# Altium PCB PCB3.pcbdoc (part 1 of 2)
Units mil, origin at the board's own origin, x right, y up, seen from the top; angles counter-clockwise.
Board outline 2519.61 x 1574.8 mil, 4 copper layers (Top Layer, Inner1, Inner2, Bottom Layer), stack 62.447 mil thick; 73 components, 68 nets, 329 pads, 85 vias.
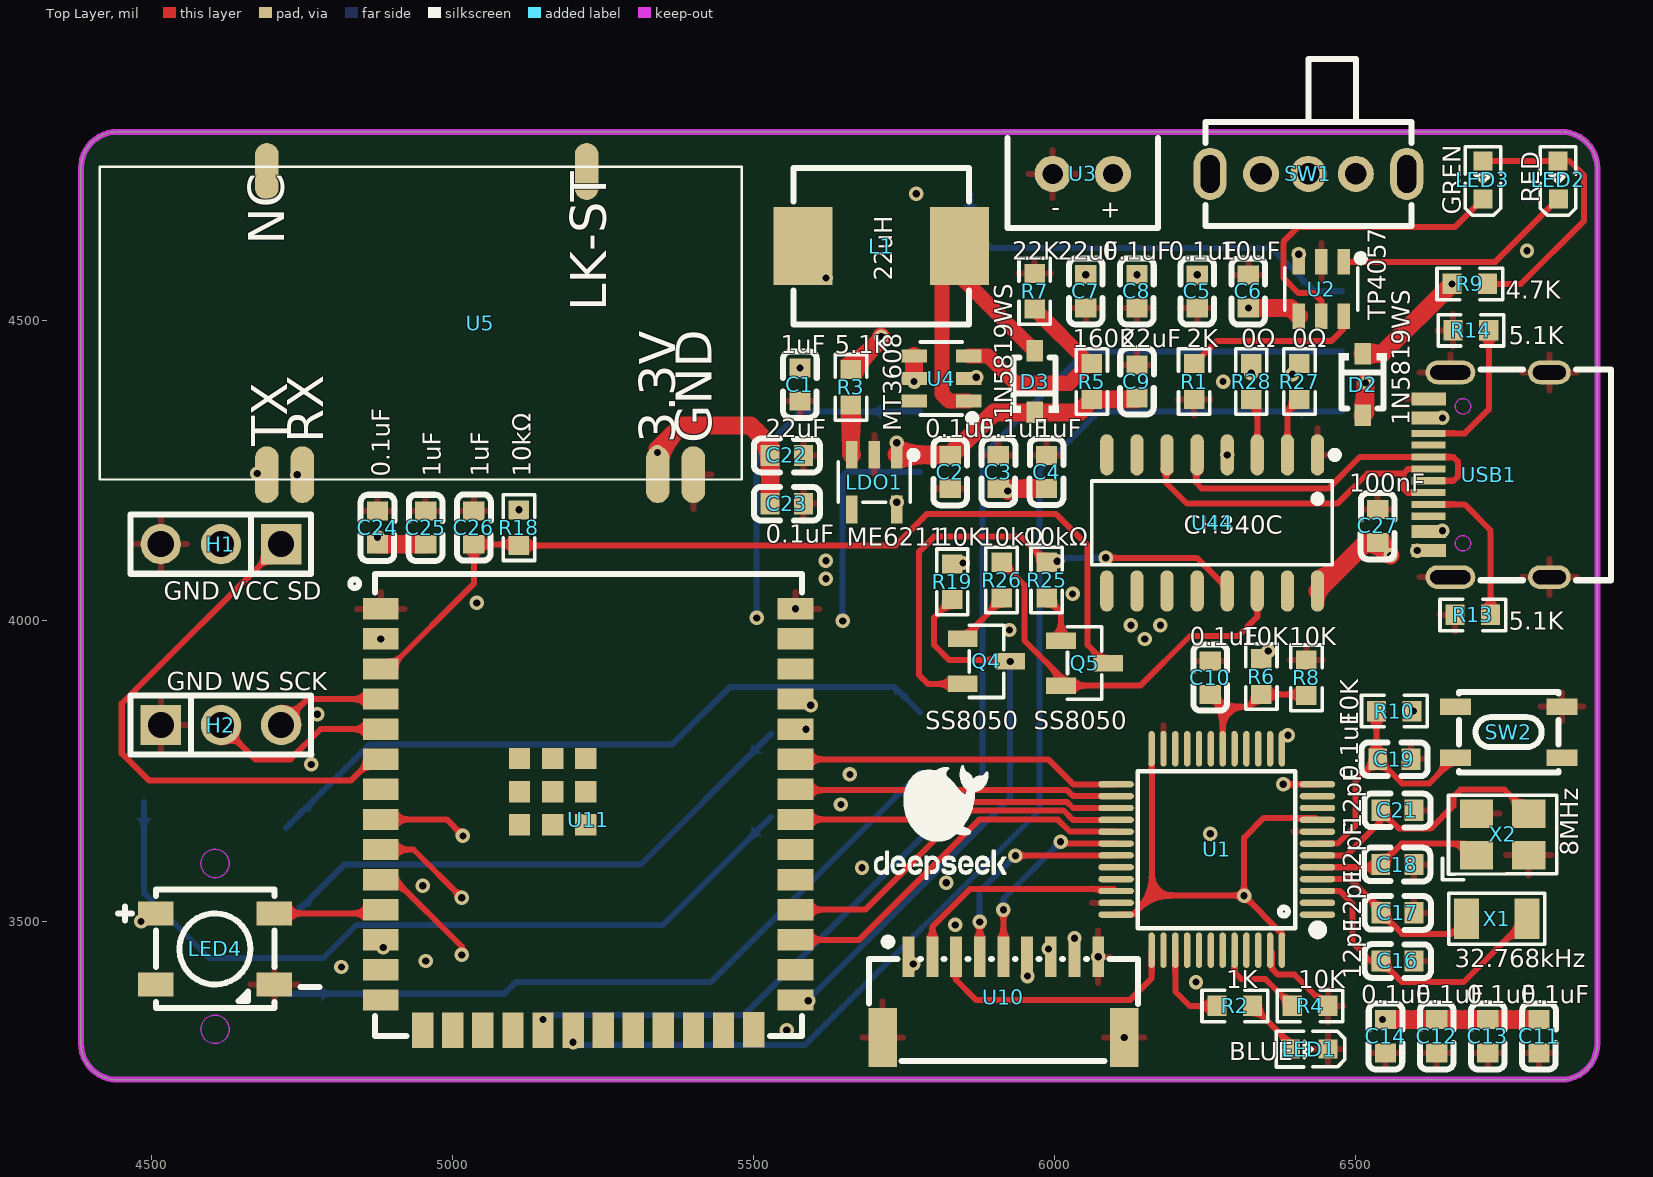
[diagram p0: Top Layer view]
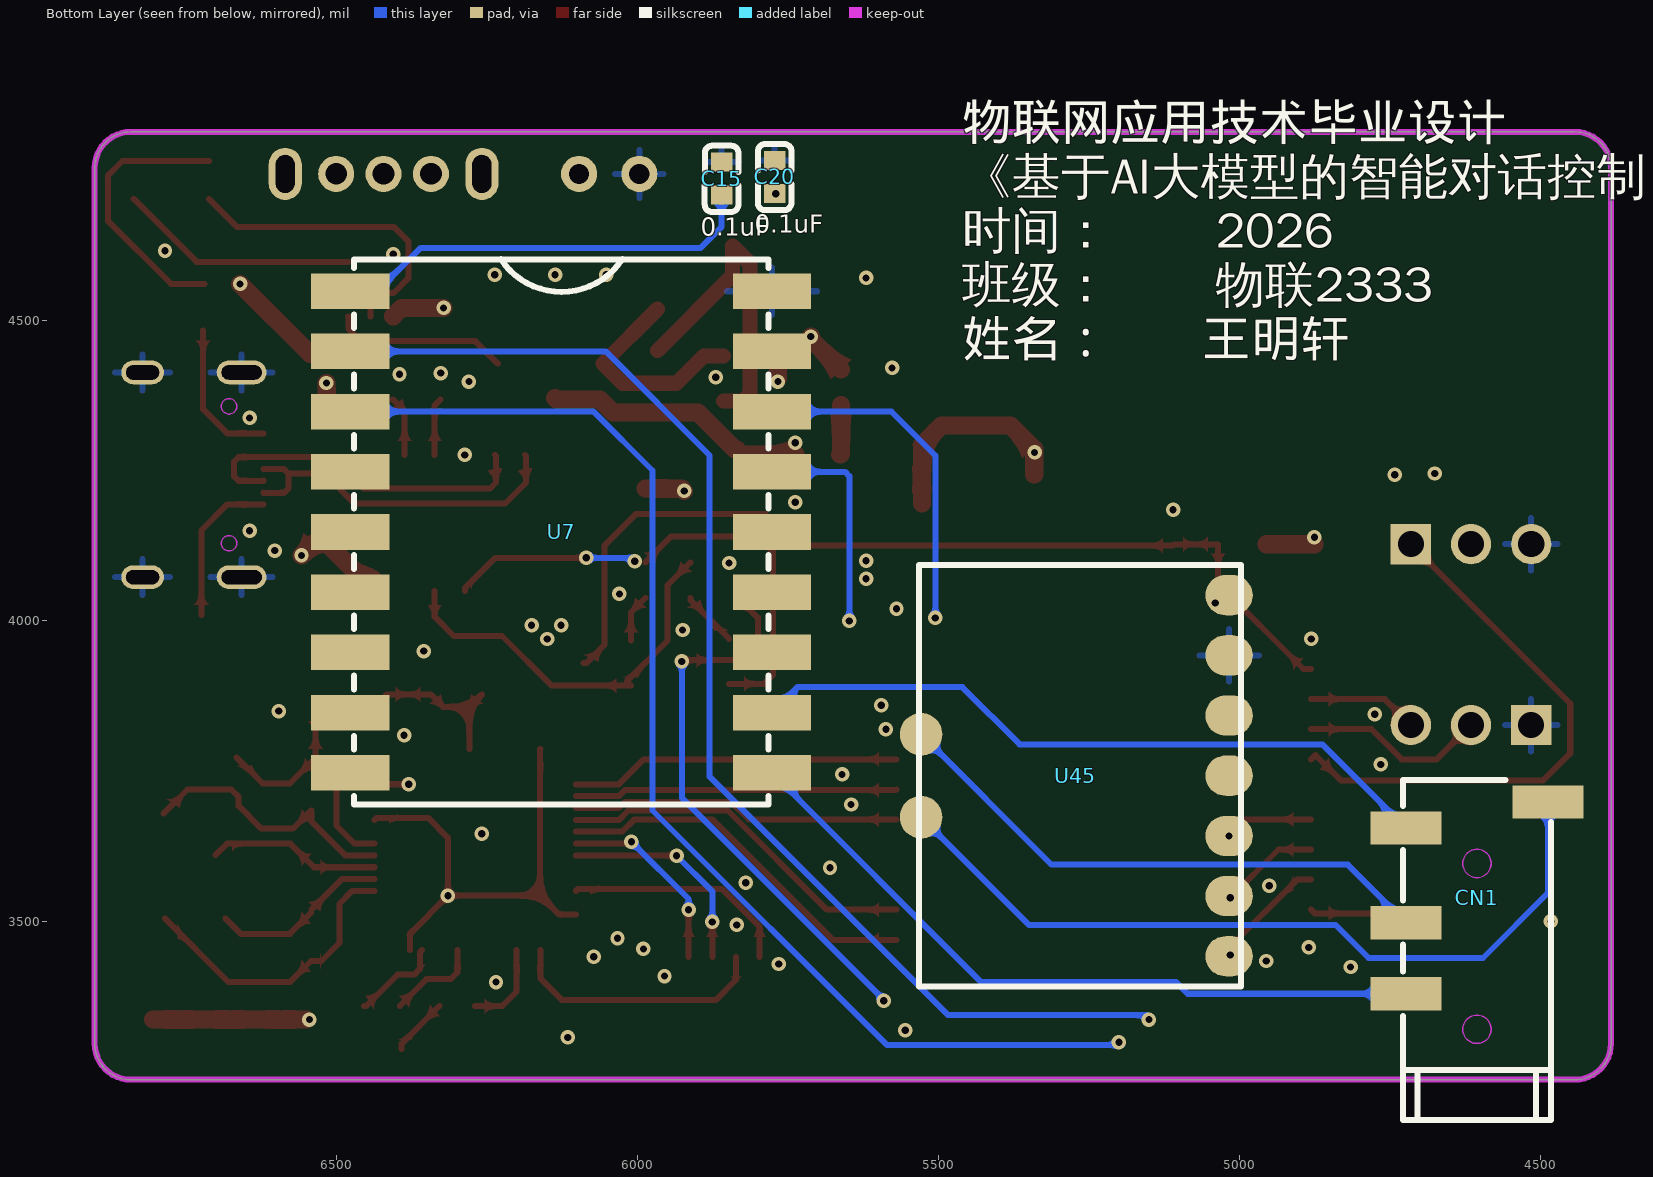
[diagram p1: Bottom Layer view, seen from below]
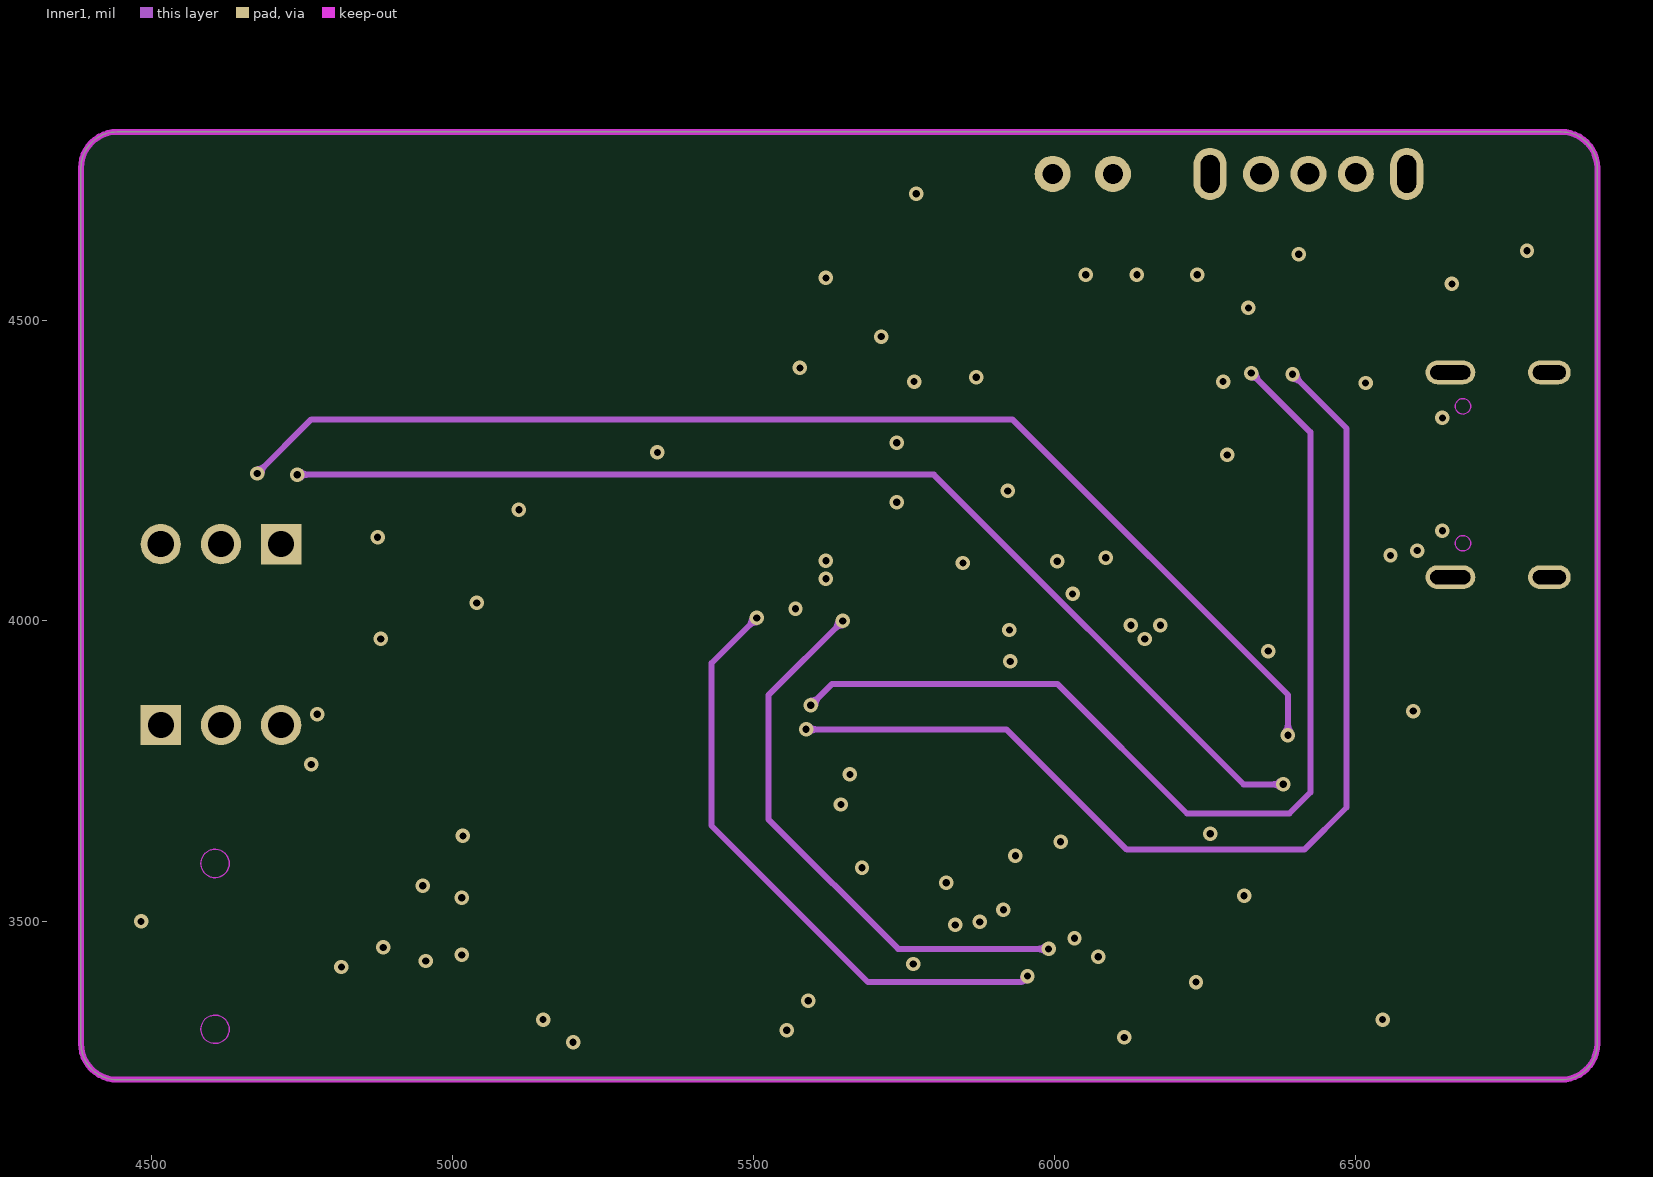
[diagram p2: Inner1]
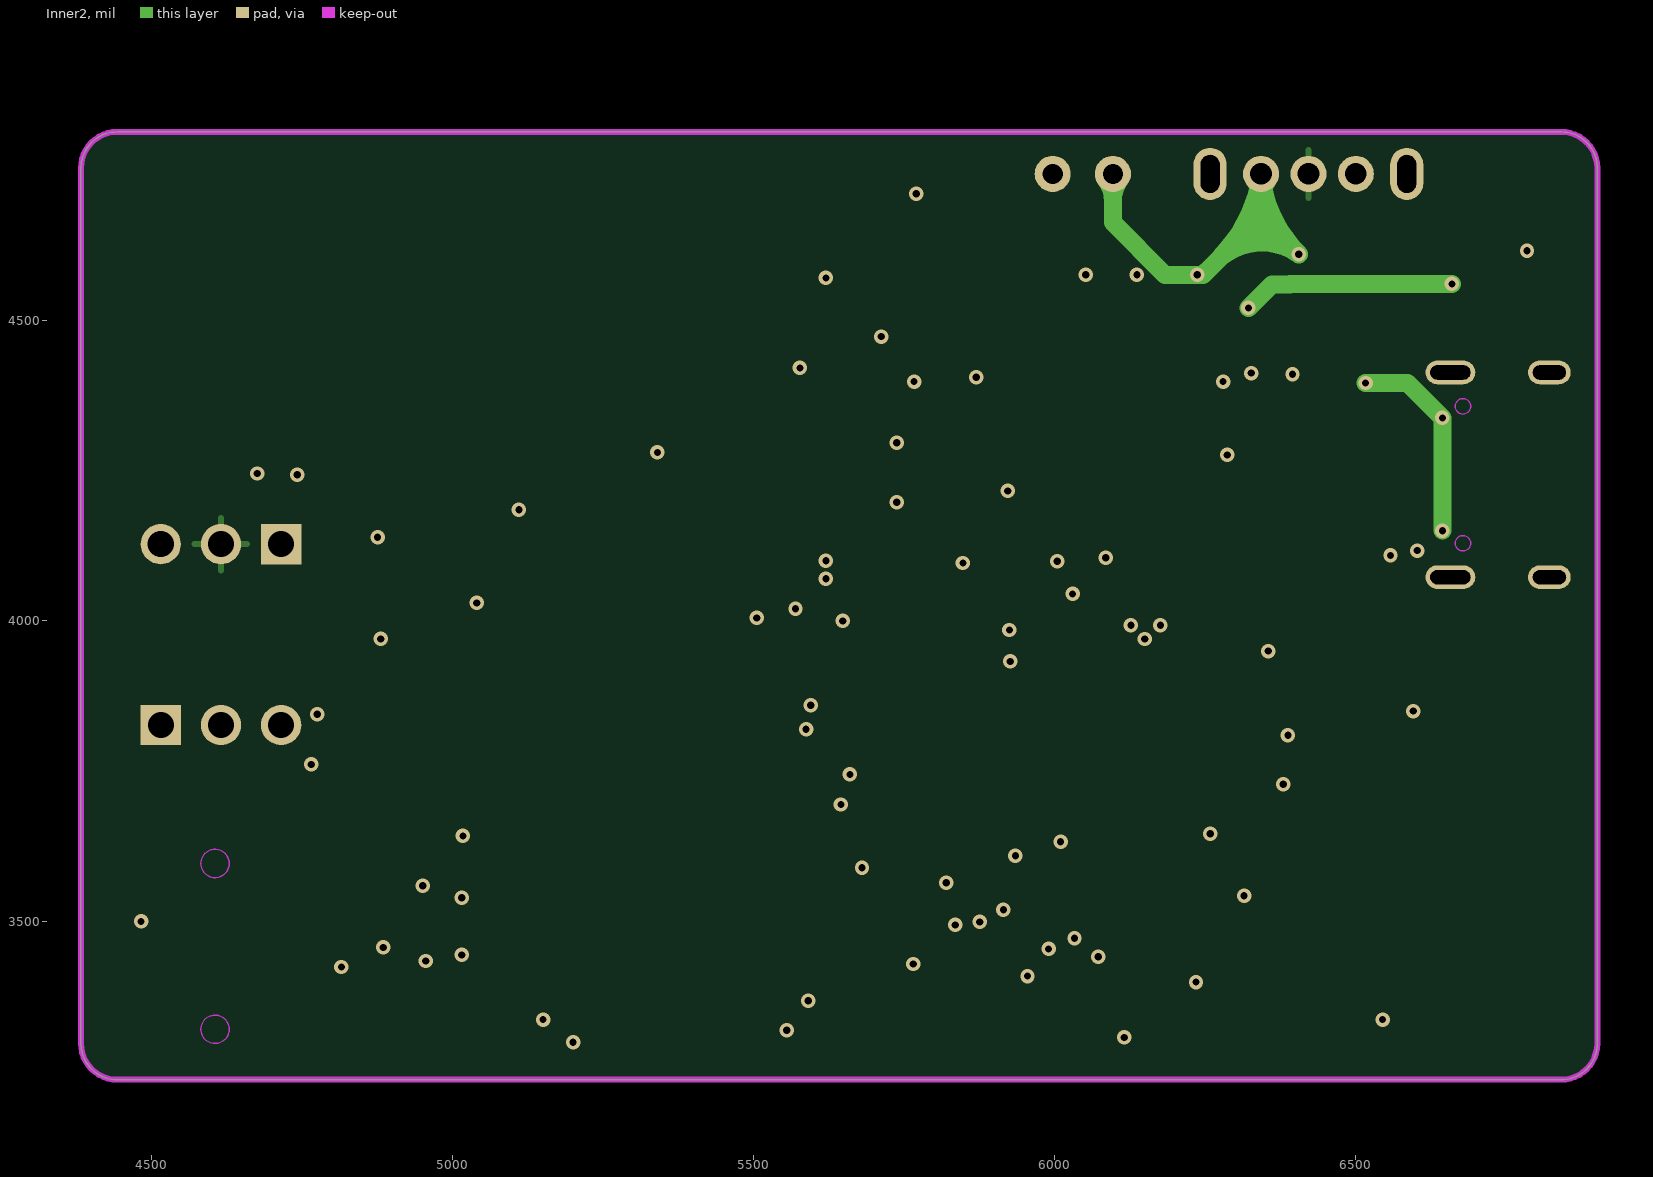
[diagram p3: Inner2]

## Layer stack, top to bottom
Top Layer: signal copper 1.378
Dielectric1: surface 8.283, 7628 RC49% 8.6mil, Dk 0
Inner1: signal copper 0.598
Dielectric2: surface 41.929, 1.1mm H/HOZ Copper, Dk 0
Inner2: signal copper 0.598
Dielectric3: surface 8.283, 7628 RC49% 8.6mil, Dk 0
Bottom Layer: signal copper 1.378

## Board outline
6841.86,3237.85 4442.25,3237.85 cw(c4442.25,3297.85) 4382.25,3297.85 4382.25,4752.66 cw(c4442.25,4752.66) 4442.25,4812.66 6841.86,4812.66 cw(c6841.86,4752.66) 6901.86,4752.66 6901.86,3297.85 cw(c6841.86,3297.85)

## Design rules (kind name [scope] priority, off if disabled: settings)
BoardOutlineClearance copperThickness1oz [All] p0: genericclearance=10 ignorepadtopadclearanceinfootprint=FALSE except(0: Arc-SplitContinuation Track-SplitContinuation SMDPad-SplitContinuation THPad-SplitContinuation Via-SplitContinuation Fill-SplitContinuation Poly-SplitContinuation Region-SplitContinuation Text-SplitContinuation)
BoardOutlineClearance copperThickness2oz [All] p0: genericclearance=10 ignorepadtopadclearanceinfootprint=FALSE except(0: Arc-SplitContinuation Track-SplitContinuation SMDPad-SplitContinuation THPad-SplitContinuation Via-SplitContinuation Fill-SplitContinuation Poly-SplitContinuation Region-SplitContinuation Text-SplitContinuation)
BoardOutlineClearance Plane_innerPlane [All] p0: genericclearance=10 ignorepadtopadclearanceinfootprint=FALSE except(0: Arc-SplitContinuation Track-SplitContinuation SMDPad-SplitContinuation THPad-SplitContinuation Via-SplitContinuation Fill-SplitContinuation Poly-SplitContinuation Region-SplitContinuation Text-SplitContinuation)
BoardOutlineClearance Copper_copperRegion [All] p0: genericclearance=10 ignorepadtopadclearanceinfootprint=FALSE except(0: Arc-SplitContinuation Track-SplitContinuation SMDPad-SplitContinuation THPad-SplitContinuation Via-SplitContinuation Fill-SplitContinuation Poly-SplitContinuation Region-SplitContinuation Text-SplitContinuation)
BoardOutlineClearance otherClearance [All] p0: genericclearance=10 ignorepadtopadclearanceinfootprint=FALSE except(0: Arc-SplitContinuation Track-SplitContinuation SMDPad-SplitContinuation THPad-SplitContinuation Via-SplitContinuation Fill-SplitContinuation Poly-SplitContinuation Region-SplitContinuation Text-SplitContinuation)
Clearance copperThickness1oz [All] p1: gap=7 ignorepadtopadclearanceinfootprint=FALSE
Clearance copperThickness2oz [All] p1: gap=7 ignorepadtopadclearanceinfootprint=FALSE
Clearance Plane_innerPlane [All] p1: gap=7 ignorepadtopadclearanceinfootprint=FALSE
Clearance Copper_copperRegion [All] p1: gap=7 ignorepadtopadclearanceinfootprint=FALSE
Clearance otherClearance [All] p1: gap=7 ignorepadtopadclearanceinfootprint=FALSE
DiffPairsRouting differentialPair [All] p1: maxuncoupledlength=10 minlimit=6 maxlimit=Infinity mostfreqgap=6 toplayer_minwidth=5 toplayer_prefwidth=10 toplayer_maxwidth=100 bottomlayer_minwidth=5 bottomlayer_prefwidth=10 bottomlayer_maxwidth=100 midlayer1_minwidth=5 midlayer1_prefwidth=10 midlayer1_maxwidth=100 midlayer2_minwidth=5 midlayer2_prefwidth=10 midlayer2_maxwidth=100
PasteMaskExpansion pasteMaskExpansion [All] p1: expansion=0
PlaneConnect innerPlane [All] p1: planeconnectstyle=Relief reliefexpansion=20 reliefentries=4 reliefconductorwidth=10 reliefairgap=10
PolygonConnect copperRegion [All] p1: connectstyle=Relief reliefentries=4 reliefconductorwidth=10 polygonreliefangle="90 Angle" airgapwidth=10
RoutingVias viaSize [All] p1: viastyle="Through Hole" holewidth=12.0078 minholewidth=11.811 maxholewidth=248.0314 width=12.0078 minwidth=11.811 maxwidth=248.0314
SolderMaskExpansion solderMaskExpansion [IsVia] p1: useseparateexpansions=TRUE expansion=-1000 expansionbottom=-1000
SolderMaskExpansion solderMaskExpansion [All] p2: useseparateexpansions=TRUE expansion=2 expansionbottom=2
Width copperThickness1oz [All] p1: maxlimit=100 minlimit=5 preferedwidth=10
Width copperThickness2oz [All] p1: maxlimit=100 minlimit=8 preferedwidth=10

## Components (designator, comment, footprint, x,y, rotation, side; value= is the part's Value field where it differs from the comment)
C1 "1uF" C0603 5576.86,4392.85 r90 top
C2 "0.1uF" C0603 5826.65,4247.51 r90 top
C3 "0.1uF" C0603 5906.65,4247.51 r270 top
C4 "1uF" C0603 5986.65,4247.51 r270 top
C5 "0.1uF" C0603 6237.07,4547.64 r90 top
C6 "10uF" C0603 6322.07,4547.64 r90 top
C7 "22uF" C0603 6051.86,4547.85 r90 top
C8 "0.1uF" C0603 6136.86,4547.85 r90 top
C9 "22uF" C0603 6136.86,4397.85 r270 top
C10 "0.1uF" C0603 6258.53,3905.57 r270 top
C11 "0.1uF" C0603 6805,3310 r90 top
C12 "0.1uF" C0603 6635,3310 r90 top
C13 "0.1uF" C0603 6720,3310 r90 top
C14 "0.1uF" C0603 6550,3310 r90 top
C15 "0.1uF" C0603 5860,4735 r90 bottom
C16 "12pF" C0603 6570,3435 r180 top
C17 "12pF" C0603 6570,3515 r180 top
C18 "12pF" C0603 6569.54,3595.28 r0 top
C19 "0.1uF" C0603 6564.54,3770.28 r180 top
C20 "0.1uF" C0603 5771.86,4737.85 r90 bottom
C21 "12pF" C0603 6569.54,3685.28 r180 top
C22 "22uF" C0603 5555,4275 r180 top
C23 "0.1uF" C0603 5555,4195 r180 top
C24 "0.1uF" C0603 4875,4155 r90 top
C25 "1uF" C0603 4955,4155 r90 top
C26 "1uF" C0603 5035,4155 r270 top
C27 "100nF" C0603 6536.86,4157.85 r90 top
CN1 "PJ-320D" AUDIO-SMD_PJ-320D 4605,3540 r0 bottom
D2 "1N5819WS" SOD-323_L1.6-W1.3-LS2.7-RD 6511.86,4392.85 r270 top
D3 "1N5819WS" SOD-323_L1.6-W1.3-LS2.7-RD 5966.86,4397.85 r90 top
H1 "PZ254V-11-03P" HDR-TH_3P-P2.54-V-M 4614.84,4127.65 r180 top
H2 "PZ254V-11-03P" HDR-TH_3P-P2.54-V-M 4614.86,3827 r0 top
L1 "22uH" IND-SMD_L7.4-W6.6 5711.86,4622.85 r0 top
LDO1 "ME6211" SOT-23-5_L3.0-W1.7-P0.95-LS2.8-BL 5700.4,4230.82 r180 top
LED1 "BLUE" LED0603-RD_RED 6423.19,3288.66 r180 top
LED2 "RED" LED0603-RD_RED 6836.86,4732.85 r90 top
LED3 "GREN" LED0603-RD_RED 6711.86,4732.85 r90 top
LED4 "XL-5050RGBC-WS2812B" LED-SMD_4P-L5.0-W5.0-BL_XL-5050RGBC 4605,3455 r270 top
Q4 "SS8050" SOT-23-3_L2.9-W1.3-P1.90-LS2.4-BR 5886.86,3932.85 r180 top
Q5 "SS8050" SOT-23-3_L2.9-W1.3-P1.90-LS2.4-BR 6050,3930 r180 top
R1 "2K" R0603 6231.86,4397.85 r90 top
R2 "1K" R0603 6299.54,3360.28 r180 top
R3 "5.1K" R0603 5661.65,4388.19 r270 top
R4 "10K" R0603 6424.54,3360.28 r180 top
R5 "160K" R0603 6061.86,4397.85 r90 top
R6 "10K" R0603 6343.66,3907.6 r90 top
R7 "22K" R0603 5966.86,4547.85 r90 top
R8 "10K" R0603 6418.53,3905.57 r270 top
R9 "4.7K" R0603 6690,4560 r180 top
R10 "10K" R0603 6564.54,3850.28 r0 top
R13 "5.1K" R0603 6695,4010 r0 top
R14 "5.1K" R0603 6691.86,4482.85 r0 top
R18 "10kΩ" R0603 5110,4155 r90 top
R19 "10K" R0603 5830,4065 r90 top
R25 "10kΩ" R0603 5986.86,4067.85 r90 top
R26 "10kΩ" R0603 5911.86,4067.85 r90 top
R27 "0Ω" R0603 6406.86,4397.85 r90 top
R28 "0Ω" R0603 6326.86,4397.85 r90 top
SW1 "SK12D07VG4" SW-TH_SK12D07VG4 6421.86,4742.85 r180 top
SW2 "TS-KG89S-AT25F" SW-SMD_4P-L4.2-W3.3-P2.15-LS5.1 6754.54,3815.28 r0 top
U1 "STM32F103C8T6" LQFP-48_L7.0-W7.0-P0.50-LS9.0-BL 6269.54,3620.28 r90 top
U2 "TP4057" SOT-23-6_L2.9-W1.6-P0.95-LS2.8-BL 6443.17,4551.52 r180 top
U3 "" 1*2-2.54单排针 6096.86,4742.85 r180 top
U4 "MT3608" SOT-23-6_L2.9-W1.6-P0.95-LS2.8-BL 5811.86,4402.85 r90 top
U5 "DX-BT27" DX-BT24 4945,4495 r90 top
U7 "ASRPRO-core" COMM-SMD_ASRPRO-CORE-V1.1 6126.86,4147.85 r180 bottom
U10 "ZX-SH1.0-9PWT" CONN-SMD_9P-P1.00_ZX-SH1.0-9PWT 5915,3375 r0 top
U11 "ESP32-S3-WROOM-1U-N16R8" WIRELM-SMD_ESP32-S3-WROOM-1U 5225,3670 r0 top
U44 "CH340C" SOP-16_L10.0-W3.9-P1.27-LS6.0-BL 6261.86,4162.85 r180 top
U45 "" MAX98357moudle 5376.86,3742.85 r90 bottom
USB1 "TYPE-C16PIN" ? 6721.86,4242.85 r90 top
X1 "32.768kHz" OSC-SMD_L3.2-W1.5 6734.54,3505.28 r180 top
X2 "8MHz" CRYSTAL-SMD_4P-L3.2-W2.5-BL-1 6744.54,3645.28 r0 top

## Footprints (in the part's own frame and the unit in brackets; to place one, negate y for a bottom-side part, rotate by r counter-clockwise, add the part's x,y. Pads: shape width x height; smd on the part's side, far side on the other; paste and mask are expansions set on the pad)
1*2-2.54单排针 [mil]
  round 60 hole 33.46: 1(0,0) 2(100,0)
AUDIO-SMD_PJ-320D [mm]
  rect 3x1.4 smd: 1(-3,-4.05) 2(3,4.05) 3(3,1.05) 4(3,-2.95)
  Board Outline Layer circle w0.003: c0,-1.45 r0.6
  Board Outline Layer circle w0.003: c0,5.55 r0.6
  Board Outline Layer region: 0.6,-1.45 0.541,-1.19 0.374,-0.981 0.134,-0.865 -0.134,-0.865 -0.374,-0.981 -0.541,-1.19 -0.6,-1.45 -0.6,-1.45 -0.541,-1.71 -0.374,-1.919 -0.134,-2.035 0.134,-2.035 0.374,-1.919 0.541,-1.71 0.6,-1.45
  Board Outline Layer region: 0.6,-1.45 0.541,-1.19 0.374,-0.981 0.134,-0.865 -0.134,-0.865 -0.374,-0.981 -0.541,-1.19 -0.6,-1.45 -0.6,-1.45 -0.541,-1.71 -0.374,-1.919 -0.134,-2.035 0.134,-2.035 0.374,-1.919 0.541,-1.71 0.6,-1.45
  Board Outline Layer region: 0.6,5.55 0.541,5.81 0.374,6.019 0.134,6.135 -0.134,6.135 -0.374,6.019 -0.541,5.81 -0.6,5.55 -0.6,5.55 -0.541,5.29 -0.374,5.081 -0.134,4.965 0.134,4.965 0.374,5.081 0.541,5.29 0.6,5.55
  Board Outline Layer region: 0.6,5.55 0.541,5.81 0.374,6.019 0.134,6.135 -0.134,6.135 -0.374,6.019 -0.541,5.81 -0.6,5.55 -0.6,5.55 -0.541,5.29 -0.374,5.081 -0.134,4.965 0.134,4.965 0.374,5.081 0.541,5.29 0.6,5.55
  silkscreen extent -3.12,-4.98 3.13,9.37
C0603 [mm]
  rect 0.8x0.9 smd: 1(-0.7,0) 2(0.7,0)
  silkscreen extent -1.41,-0.71 1.39,0.72
COMM-SMD_ASRPRO-CORE-V1.1 [mm]
  rect 3.3x1.5 smd: 1(-8.9,10.16) 2(-8.9,7.62) 3(-8.9,5.08) 4(-8.9,2.54) 5(-8.9,0) 6(-8.9,-2.54) 7(-8.9,-5.08) 8(-8.9,-7.62) 9(-8.9,-10.16) 10(8.9,-10.16) 11(8.9,-7.62) 12(8.9,-5.08) 13(8.9,-2.54) 14(8.9,0) 15(8.9,2.54) 16(8.9,5.08) 17(8.9,7.62) 18(8.9,10.16)
  silkscreen extent -8.75,-11.5 8.75,11.52
CONN-SMD_9P-P1.00_ZX-SH1.0-9PWT [mm]
  rect 0.5x1.7 smd paste+0 mask+0.05: 1(-4,1.7) 2(-3,1.7) 3(-2,1.7) 4(-1,1.7) 5(0,1.7) 6(1,1.7) 7(2,1.7) 8(3,1.7) 9(4,1.7)
  rect 1.2x2.5 smd paste+0 mask+0.05: 10(5.1,-1.7) 11(-5.1,-1.7)
  silkscreen extent -5.68,-2.7 5.67,2.64
CRYSTAL-SMD_4P-L3.2-W2.5-BL-1 [mm]
  rect 1.4x1.2 smd: 1(-1.1,-0.875) 2(1.1,-0.875) 3(1.1,0.875) 4(-1.1,0.875)
  silkscreen extent -2.54,-1.9 2.29,1.65
DX-BT24 [mm]
  rrect100% 2.4x1 smd: 1(-6.4,6.45) 2(-6.4,4.95) 12(-6.4,-10.05) 13(-6.4,-11.55) 17(6.4,-7.05) 26(6.4,6.45)
  silkscreen extent -6.6,-13.6 6.6,13.5
HDR-TH_3P-P2.54-V-M [mm]
  rect 1.7x1.7 hole 1.1: 1(-2.54,0)
  round 1.7 hole 1.1: 2(0,0) 3(2.54,0)
  silkscreen extent -3.81,-1.25 3.81,1.25
IND-SMD_L7.4-W6.6 [mm]
  rect 2.5x3.3 smd: 1(-3.302,0) 2(3.302,0)
  silkscreen extent -3.7,-3.3 3.7,3.3
LED0603-RD_RED [mm]
  rect 0.8x0.8 smd: 1(-0.8,-0.003) 2(0.8,0.003)
  silkscreen extent -1.49,-0.75 1.39,0.76
LED-SMD_4P-L5.0-W5.0-BL_XL-5050RGBC [mm]
  rect 1x1.5 smd: 1(-1.5,-2.5) 2(1.5,-2.5) 3(1.5,2.5) 4(-1.5,2.5)
  silkscreen extent -2.5,-4.1 2.5,4.4
LQFP-48_L7.0-W7.0-P0.50-LS9.0-BL [mm]
  oval 0.27x1.5 smd paste+0 mask+0.05: 1(-2.75,-4.25) 2(-2.25,-4.25) 3(-1.75,-4.25) 4(-1.25,-4.25) 5(-0.75,-4.25) 6(-0.25,-4.25) 7(0.25,-4.25) 8(0.75,-4.25) 9(1.25,-4.25) 10(1.75,-4.25) 11(2.25,-4.25) 12(2.75,-4.25) 25(2.75,4.25) 26(2.25,4.25) 27(1.75,4.25) 28(1.25,4.25) 29(0.75,4.25) 30(0.25,4.25) 31(-0.25,4.25) 32(-0.75,4.25) 33(-1.25,4.25) 34(-1.75,4.25) 35(-2.25,4.25) 36(-2.75,4.25)
  oval 1.5x0.27 smd paste+0 mask+0.05: 13(4.25,-2.75) 14(4.25,-2.25) 15(4.25,-1.75) 16(4.25,-1.25) 17(4.25,-0.75) 18(4.25,-0.25) 19(4.25,0.25) 20(4.25,0.75) 21(4.25,1.25) 22(4.25,1.75) 23(4.25,2.25) 24(4.25,2.75) 37(-4.25,2.75) 38(-4.25,2.25) 39(-4.25,1.75) 40(-4.25,1.25) 41(-4.25,0.75) 42(-4.25,0.25) 43(-4.25,-0.25) 44(-4.25,-0.75) 45(-4.25,-1.25) 46(-4.25,-1.75) 47(-4.25,-2.25) 48(-4.25,-2.75)
  silkscreen extent -3.59,-4.46 3.3,3.34
MAX98357moudle [mm]
  oval 1.7x2 smd: 1(-7.62,-9.144) 2(-5.08,-9.144) 3(-2.54,-9.144) 4(0,-9.144) 5(2.54,-9.144) 6(5.08,-9.144) 7(7.62,-9.144)
  round 1.8 smd: 8(-1.75,3.856) 9(1.75,3.856)
  silkscreen extent -8.9,-9.66 8.9,3.94
OSC-SMD_L3.2-W1.5 [mm]
  rect 1.05x1.7 smd: 1(-1.275,0) 2(1.275,0)
  silkscreen extent -2.03,-1.08 2.03,1.08
R0603 [mil]
  rect 31.75x34.02 smd paste-3937.01 mask+2: 1(-29.66,0) 2(29.66,0)
  silkscreen extent -55,-26 55,26
SOD-323_L1.6-W1.3-LS2.7-RD [mm]
  rect 0.9x0.7 smd paste+0 mask+0.05: 1(-1.3,0) 2(1.3,0)
  silkscreen extent -1.32,-1.02 1.02,1.02
SOP-16_L10.0-W3.9-P1.27-LS6.0-BL [mm]
  oval 0.56x1.745 smd paste+0 mask+0.051: 1(-4.445,-2.872) 2(-3.175,-2.872) 3(-1.905,-2.872) 4(-0.635,-2.872) 5(0.635,-2.872) 6(1.905,-2.872) 7(3.175,-2.872) 8(4.445,-2.872) 9(4.445,2.872) 10(3.175,2.872) 11(1.905,2.872) 12(0.635,2.872) 13(-0.635,2.872) 14(-1.905,2.872) 15(-3.175,2.872) 16(-4.445,2.872)
  silkscreen extent -5.33,-3.02 5.08,1.77
SOT-23-3_L2.9-W1.3-P1.90-LS2.4-BR [mm]
  rect 1.25x0.7 smd: 1(1,-0.95) 2(1,0.95) 3(-1,0)
  silkscreen extent -0.73,-1.53 0.73,1.53
SOT-23-5_L3.0-W1.7-P0.95-LS2.8-BL [mm]
  rect 0.49x1.157 smd: 1(-0.95,-1.154) 2(0,-1.154) 3(0.95,-1.154)
  rect 0.49x1.175 smd: 4(0.95,1.154) 5(-0.95,1.154)
  silkscreen extent -1.8,-1.29 1.53,0.85
SOT-23-6_L2.9-W1.6-P0.95-LS2.8-BL [mil]
  rect 20.95x42.2 smd: 1(-37.4,-45.24) 2(0,-45.24) 3(37.4,-45.24) 4(37.4,45.24) 5(0,45.24) 6(-37.4,45.24)
  silkscreen extent -72,-57 61,35
SW-SMD_4P-L4.2-W3.3-P2.15-LS5.1 [mm]
  rect 1.3x0.7 smd: 1(-2.25,1.075) 2(2.25,1.075) 3(-2.25,-1.075) 4(2.25,-1.075)
  silkscreen extent -2.1,-1.7 2.1,1.7
SW-TH_SK12D07VG4 [mil]
  round 60 hole 36 paste+0 mask+1.97: 1(-78.74,0) 2(0,0) 3(78.74,0)
  oval 55.12x86.61 hole 31.5 slot 62.99 at 90 deg paste+0 mask+1.97: 4(163.38,0) 5(-163.39,0)
  silkscreen extent -171,-191 171,87
WIRELM-SMD_ESP32-S3-WROOM-1U [mm]
  rect 1.5x0.9 smd paste+0 mask+0.05: 1(-8.75,8.895) 2(-8.75,7.625) 3(-8.75,6.355) 4(-8.75,5.085) 5(-8.75,3.815) 6(-8.75,2.545) 7(-8.75,1.275) 8(-8.75,0.005) 9(-8.75,-1.265) 10(-8.75,-2.535) 11(-8.75,-3.805) 12(-8.75,-5.075) 13(-8.75,-6.345) 14(-8.75,-7.615) 27(8.75,-7.615) 28(8.75,-6.345) 29(8.75,-5.075) 30(8.75,-3.805) 31(8.75,-2.535) 32(8.75,-1.265) 33(8.75,0.005) 34(8.75,1.275) 35(8.75,2.545) 36(8.75,3.815) 37(8.75,5.085) 38(8.75,6.355) 39(8.75,7.625) 40(8.75,8.895)
  rect 0.9x1.5 smd paste+0 mask+0.05: 15(-6.985,-8.895) 16(-5.715,-8.895) 17(-4.445,-8.895) 18(-3.175,-8.895) 19(-1.905,-8.895) 20(-0.635,-8.895) 21(0.635,-8.895) 22(1.905,-8.895) 23(3.175,-8.895) 24(4.445,-8.895) 25(5.715,-8.895) 26(6.985,-8.865)
  rect 0.9x0.9 smd: 41(-2.9,-0.225) 41(-2.9,1.175) 41(-2.9,2.575) 41(-1.5,-0.225) 41(-1.5,1.175) 41(-1.5,2.575) 41(-0.1,-0.225) 41(-0.1,1.175) 41(-0.1,2.575)
  silkscreen extent -10.04,-9.14 9.02,10.36
? [mm]
  oval 1x2.1 hole 0.6 slot 1.7 at 90 deg paste+0 mask+0.051: 1(-4.32,1.63) 2(4.32,1.63)
  oval 1x1.8 hole 0.6 slot 1.4 at 90 deg paste+0 mask+0.051: 3(-4.32,-2.55) 4(4.32,-2.55)
  rect 0.55x1.45 smd paste-100 mask+0.051: A1B12(-3.2,2.55) A4B9(-2.4,2.55) B1A12(3.2,2.55) B4A9(2.4,2.55)
  rect 0.3x1.45 smd paste-100 mask+0.051: A5(-1.25,2.55) A6(-0.25,2.55) A7(0.25,2.55) A8(1.25,2.55) B5(1.75,2.55) B6(0.75,2.55) B7(-0.75,2.55) B8(-1.75,2.55)
  Board Outline Layer circle w0.003: c-2.89,1.1 r0.325
  Board Outline Layer circle w0.003: c2.89,1.1 r0.325
  Board Outline Layer region: -2.89,0.775 -3.031,0.807 -3.144,0.897 -3.207,1.027 -3.207,1.172 -3.144,1.302 -3.031,1.393 -2.89,1.425 -2.89,1.425 -2.749,1.393 -2.636,1.302 -2.573,1.172 -2.573,1.027 -2.636,0.897 -2.749,0.807 -2.89,0.775
  Board Outline Layer region: -2.89,0.775 -3.031,0.807 -3.144,0.897 -3.207,1.027 -3.207,1.172 -3.144,1.302 -3.031,1.393 -2.89,1.425 -2.89,1.425 -2.749,1.393 -2.636,1.302 -2.573,1.172 -2.573,1.027 -2.636,0.897 -2.749,0.807 -2.89,0.775
  Board Outline Layer region: 2.89,0.775 2.749,0.807 2.636,0.897 2.573,1.027 2.573,1.172 2.636,1.302 2.749,1.393 2.89,1.425 2.89,1.425 3.031,1.393 3.144,1.302 3.207,1.172 3.207,1.027 3.144,0.897 3.031,0.807 2.89,0.775
  Board Outline Layer region: 2.89,0.775 2.749,0.807 2.636,0.897 2.573,1.027 2.573,1.172 2.636,1.302 2.749,1.393 2.89,1.425 2.89,1.425 3.031,1.393 3.144,1.302 3.207,1.172 3.207,1.027 3.144,0.897 3.031,0.807 2.89,0.775
  silkscreen extent -4.45,-5.15 4.45,0.36

## Via types
v1: diameter 24.02, hole 12.01, Top Layer to Bottom Layer, 85 vias

## Nets (pads, with @x,y where several pads share a name; then routed paths per layer and width w, separated by ;. In a path a pad name is that pad's centre, name@x,y a point inside that pad or via, vN(x,y) a via of type N, cw(c..) or ccw(c..) an arc to the next point about the centre after c; other vN are vias at no path point)
3.7V: C7.2 C8.2 L1.1 R6.2 SW1.2 U4.4 U4.5 | length 37.4
  Top Layer w30: U4.5@5766.62,4402.85 U4.4@5766.62,4440.25
  other v1: 6355,3950 5766.62,4397.85 5620,4570 6051.86,4575.41 6136.86,4575.41
3V3: C3.2 C4.2 C11.2 C12.2 C13.2 C14.2 C22.2 C23.2 LDO1.5 R10.2 U1.9 U1.24 U1.36 U1.48 U5.12 U10.1 | length 1502.5
  Top Layer w10: U1.36@6102.22,3512.01 6129.79,3512.01 6161.6,3543.82 ; U1.24@6161.27,3787.6 6161.6,3787.26 6161.6,3543.82 ; U1.48@6377.81,3452.96 6377.81,3480.53 v1(6314.85,3543.48) ; U1.9@6436.86,3669.49 6433.46,3672.88 6347.88,3672.88 6314.85,3639.85 v1(6314.85,3543.48) ; v1(6545,3337.56) C14.2@6550,3337.56 ; 6161.6,3543.82 6314.51,3543.82 v1(6314.85,3543.48)
  Top Layer w30: U5.12@5340.67,4243.03 5340.67,4285.67 5380,4325 5495,4325 5527.43,4292.57 C22.2@5527.44,4275 C23.2@5527.44,4195 ; v1(5922.39,4216.03) 5926.3,4219.95 C4.2@5986.65,4219.95 ; C14.2@6550,3337.56 C12.2@6635,3337.56 C13.2@6720,3337.56 C11.2@6805,3337.56
  other v1: 5765,3430 6595.83,3850.28 5737.8,4197.31 5340,4280
5V: C1.2 C2.2 C9.2 C20.1 C24.1 C25.1 C27.1 D3.1 H1.2 LDO1.1 LED4.1 R3.1 R5.1 R18.2 R19.2 U7.17 U10.8 U11.2 U11.12 U44.4 U44.16 U45.7 | length 745
  Top Layer w30: C24.1@4875,4127.44 C25.1@4955,4127.44 ; R3.1@5661.65,4417.85 5711.86,4468.06 v1(5711.86,4472.46) ; LDO1.1@5737.8,4276.24 C2.2@5825.47,4276.24 ; C2.2@5825.86,4275.86 C2.2@5826.65,4275.07 ; C2.2@5835,4285 5837.9,4285 5899.57,4346.67 D3.1@5966.86,4346.67 6040.34,4346.67 R5.1@6061.86,4368.19 6134.76,4368.19 C9.2@6136.86,4370.29 ; U44.16@6436.86,4049.76 6517.39,4130.29 C27.1@6536.86,4130.29 v1(6558.22,4108.89)
  other v1: 4884.64,3457.58 6033.1,3472.67 4482.17,3500.72 4880.51,3970.2 5040,4030 5847.72,4096.3 4875,4139.04 5110,4184.66 6286.86,4275.94 5737.8,4296.27 5576.86,4420.41 5770,4710
$1N3871: LED1.2 R2.1 | length 97.6
  Top Layer w10: R2.1@6329.2,3360.28 6391.71,3297.76 LED1.2@6391.71,3288.52
$1N3906: R1.2 U2.6 | length 293.5
  Top Layer w10: R1.2@6231.86,4427.51 6269.35,4465 6460,4465 6480,4485 6480,4505.71 U2.6@6480.57,4506.28
$1N3916: LED2.2 LED3.2 R9.1 | length 457.2
  Top Layer w10: LED3.2@6711.72,4764.33 LED2.2@6836.72,4764.33 6855.67,4764.33 6880,4740 6880,4665 6775,4560 R9.1@6719.66,4560
$1N3920: R5.2 R7.1 U4.3 | length 365.2
  Top Layer w10: R5.2@6057.54,4427.51 R5.2@6061.86,4427.51
  Top Layer w25: U4.3@5857.1,4440.25 5889.75,4440.25 5935,4395 6025.03,4395 6057.54,4427.51 R7.1@5966.86,4518.19
$1N3924: D3.2 L1.2 U4.1 | length 532.3
  Top Layer w25: U4.1@5857.1,4365.45 5824.55,4365.45 5812.93,4377.07 5812.93,4593.92 L1.2@5841.86,4622.85 5841.86,4574.03 D3.2@5966.86,4449.03
$1N3925: R14.2 USB1.B5 | length 247.9
  Top Layer w10: USB1.B5@6621.45,4311.75 6681.75,4311.75 6721.52,4351.52 R14.2@6721.52,4482.85
$1N3927: R13.2 USB1.A5 | length 261.5
  Top Layer w10: USB1.A5@6621.45,4193.64 6681.36,4193.64 6724.66,4150.34 R13.2@6724.66,4010
$1N3930: D2.2 USB1.A4B9 USB1.B4A9 | length 394.7
  Top Layer w30: D2.2@6511.86,4341.67 6516.86,4346.67 v1(6516.86,4395.37)
  Inner2 w30: v1(6516.86,4395.37) 6586.42,4395.37 v1(6644.45,4337.34) v1(6644.45,4150.06)
$1N3970: C15.1 U7.1 | length 714.1
  Bottom Layer w10: C15.1@5860,4707.44 5860,4655 5895,4620 6360,4620 6432.15,4547.85 U7.1@6477.25,4547.85
$1N3984: U1.46
$1N3985: U1.45
$1N3986: LDO1.3 R3.2 | length 82.8
  Top Layer w30: R3.2@5661.65,4358.53 5661.65,4277.6 LDO1.3@5663,4276.24
$1N3987: U1.43
$1N4934: R27.1 U44.2 | length 100.5
  Top Layer w10: U44.2@6386.86,4275.94 6386.86,4348.19 R27.1@6406.86,4368.19
$1N4935: R28.1 U44.3 | length 96.4
  Top Layer w10: R28.1@6326.86,4368.19 6336.86,4358.19 U44.3@6336.86,4275.94
$1N5117: Q4.1 R26.1 | length 94.6
  Top Layer w10: Q4.1@5847.49,3970.25 5911.86,4034.62 R26.1@5911.86,4038.19
$1N5118: Q5.1 R25.1 | length 80.6
  Top Layer w10: R25.1@5986.86,4038.19 6010.63,4014.42 Q5.1@6010.63,3967.4
AI1: U1.29 U11.29 | length 623.9
  Top Layer w10: U11.29@5569.49,3470.2 5675.19,3470.2 5875,3670 6005.5,3670 6025.7,3649.81 U1.29@6102.22,3649.81
AI2: U1.28 U11.30 | length 607.4
  Top Layer w10: U11.30@5569.49,3520.2 5685.19,3520.2 5850,3685 6015,3685 6030.51,3669.49 U1.28@6102.22,3669.49
AI3: U1.27 U11.33 | length 548.7
  Top Layer w10: U11.33@5569.49,3670.2 5815.37,3670.2 5844.19,3699.02 6020.81,3699.02 6030.65,3689.18 U1.27@6102.22,3689.18
AI4: U1.26 U11.34 | length 537.4
  Top Layer w10: U11.34@5569.49,3720.2 5570.83,3718.86 6020.79,3718.86 6030.79,3708.86 U1.26@6102.22,3708.86
AI5: U1.25 U11.35 | length 550
  Top Layer w10: U11.35@5569.49,3770.2 5989.27,3770.2 6030.92,3728.55 U1.25@6102.22,3728.55
AS-RXD: U7.15 U10.7 | length 1307.2
  Inner1 w10: v1(5647.93,4000) 5525,3877.07 5525,3670 5740,3455 v1(5990,3455)
  Bottom Layer w10: v1(5647.93,4000) 5647.93,4240.78 5655,4247.85 U7.15@5776.47,4247.85
AS-TXD: U7.16 U10.6 | length 1584.6
  Inner1 w10: v1(5505,4005) 5430,3930 5430,3660 5690,3400 5945,3400 v1(5955,3410)
  Bottom Layer w10: v1(5505,4005) 5505,4275 5577.85,4347.85 U7.16@5776.47,4347.85
BAT: C5.2 SW1.3 U2.3 U3.1 | length 562.6
  Inner2 w30: U3.1@6096.86,4742.85 6096.86,4662.07 6183.73,4575.2 v1(6237.07,4575.2) 6246.32,4575.2 6343.12,4672 ; SW1.3@6343.12,4742.85 6343.12,4672 ; v1(6405.77,4609.36) 6343.12,4672
BCLK: U11.9 U45.2 | length 167.7
  Top Layer w10: U11.9@4880.51,3620.2 4934.81,3620.2 v1(5015,3540)
BOOT0: R4.2 U1.44 | length 155.9
  Top Layer w10: U1.44@6299.07,3452.96 6299.07,3415.93 6310,3405 6350.15,3405 R4.2@6394.88,3360.28
BT-RX: U1.12 U5.2 | length 1908.4
  Top Layer w10: v1(6380,3728.55) U1.12@6436.86,3728.55
  Inner1 w10: v1(4741.61,4243.03) 5799.45,4243.03 6313.94,3728.55 v1(6380,3728.55)
BT-TX: U1.13 U5.1 | length 2006.7
  Inner1 w10: v1(4675,4245) 4765,4335 5930,4335 6387.81,3877.19 v1(6387.81,3810.22)
CHRG: LED2.1 U2.1 | length 399.8
  Top Layer w10: U2.1@6480.57,4596.76 6732.38,4596.76 LED2.1@6836.99,4701.37
DIN: U11.8 U45.3 | length 144.9
  Top Layer w10: U11.8@4880.51,3670.2 4989.81,3670.2 v1@5015,3645
  other v1: 5016.86,3642.85
DTR: Q4.2 R25.2 U44.13 | length 837.7
  Top Layer w10: Q4.2@5847.49,3895.45 5789.55,3895.45 5775,3910 5775,4115 5800,4140 5944.37,4140 R25.2@5986.86,4097.51 ; v1(6085,4105) 6236.07,4105 6286.86,4054.21 U44.13@6286.86,4049.76
  Bottom Layer w10: v1@6000,4100 6005,4105 v1(6085,4105)
  other v1: 6004.58,4099.15
ELEC: C10.2 R6.1 R8.2 U1.18 | length 247.6
  Top Layer w10: C10.2@6258.53,3878.01 6279.38,3857.17 ; U1.18@6279.38,3787.6 6279.38,3857.17 ; R8.2@6418.53,3875.91 6416.5,3877.94 R6.1@6343.66,3877.94 6322.89,3857.17 6279.38,3857.17
GND: C1.1 C2.1 C3.1 C4.1 C5.1 C6.2 C7.1 C8.1 C9.1 C10.1 C11.1 C12.1 C13.1 C14.1 C15.2 C16.1 C17.1 C18.2 C19.1 C20.2 C21.1 C22.1 C23.1 C24.2 C25.2 C26.1 C27.2 H1.3 H2.1 LDO1.2 LED1.1 LED4.3 R1.1 R4.1 R7.2 R8.1 R13.1 R14.1 SW2.2 U1.8 U1.23 U1.35 U1.47 U2.2 U3.2 U4.2 U5.13 U7.18 U10.9 U10.10 U10.11 U11.1 U11.40 U44.1 U45.6 USB1.1 USB1.2 USB1.3 USB1.4 USB1.A1B12 USB1.B1A12 X2.2 X2.4 | length 150.6
  Top Layer w10: U1.47@6358.12,3452.96 6361.51,3449.57 6361.51,3421.99 6371.05,3412.44 6398.63,3412.44 6450.8,3360.28 R4.1@6454.2,3360.28
  other v1: 6115.78,3308.07 5555,3320 6235,3400 4815,3425 4955,3435 6072.48,3441.93 5835,3495 4950,3560 5820,3565 5680,3590 6258.63,3646.6 5645,3695 5660,3745 4764.82,3761.54 4775,3845 6150,3970 5925,3985 6126.86,3992.95 6175.93,3992.95 5569.49,4020.2 6030,4045 5620,4070 5620,4100 6602.83,4116.89 6279.97,4397.85 5870,4405 6785,4615
IO0: Q4.3 R19.1 U11.27 | length 928.1
  Top Layer w10: R19.1@5830,4035.34 5800,4005.34 5800,3960 5825,3935 5924.08,3935 v1(5926.23,3932.85)
  Bottom Layer w10: v1(5590.7,3368.98) 5590.7,3370.7 5926.23,3706.23 v1(5926.23,3932.85)
LED: R2.2 U1.39 | length 148
  Top Layer w10: U1.39@6200.64,3452.96 6200.64,3384.36 6225,3360 6269.6,3360 R2.2@6269.88,3360.28
LK-ST: U5.17
LRC: U11.10 U45.1 | length 194.6
  Top Layer w10: U11.10@4880.51,3570.2 4903.95,3570.2 5015,3459.14 v1(5015,3445)
MIC+: CN1.4 U7.11 | length 1167.7
  Bottom Layer w10: CN1.4@4723.11,3656.14 4861.97,3795 5365,3795 5460,3890 5734.32,3890 U7.11@5776.47,3847.85
MIC-: CN1.2 U7.10 | length 1205.5
  Bottom Layer w10: CN1.2@4723.11,3380.55 5085.55,3380.55 5105,3400 5428.62,3400 U7.10@5776.47,3747.85
OSC32IN: C16.2 U1.3 X1.1 | length 492.3
  Top Layer w10: U1.3@6436.86,3551.38 6473.62,3551.38 6495,3530 6495,3465 6525,3435 C16.2@6542.44,3435 6577.44,3400 6679.46,3400 X1.1@6784.74,3505.28
OSC32OT: C17.2 U1.4 X1.2 | length 293
  Top Layer w10: U1.4@6436.86,3571.07 6491.19,3571.07 C17.2@6541.98,3520.28 ; C17.2@6542.44,3515 6577.44,3480 6659.06,3480 X1.2@6684.34,3505.28
OSCIN: C18.1 U1.5 X2.1 | length 288.6
  Top Layer w10: U1.5@6436.86,3590.75 6537.45,3590.75 C18.1@6541.98,3595.28 6576.7,3630 6682.06,3630 X2.1@6701.23,3610.83
OSCOT: C21.2 U1.6 X2.3 | length 457.8
  Top Layer w10: U1.6@6436.86,3610.44 6485.44,3610.44 6541.98,3666.98 C21.2@6541.98,3685.28 6572.25,3655 6625,3655 6662.69,3692.69 6662.69,3707.9 6674.79,3720 6747.57,3720 X2.3@6787.84,3679.73
RST: C26.2 Q5.3 R18.1 U11.3 | length 1554.7
  Top Layer w10: U11.3@4880.51,3920.2 4893.29,3920.2 5035,4061.91 C26.2@5035,4127.44 5107.9,4127.44 R18.1@5110,4125.34 5735.34,4125.34 5787.5,4177.5 6002.5,4177.5 6055,4125 6055,3960 6085,3930 Q5.3@6089.37,3930
RST32: C19.2 R10.1 SW2.3 U1.7 | length 445.4
  Top Layer w10: U1.7@6436.86,3630.12 6470.12,3630.12 6500,3660 6500,3733.3 C19.2@6536.98,3770.28 ; R10.1@6534.88,3850.28 6534.88,3772.38 C19.2@6536.98,3770.28 ; SW2.3@6665.95,3772.95 6623,3730 6577.25,3730 C19.2@6536.98,3770.28
RTS: Q5.2 R26.2 U44.14 | length 668.1
  Top Layer w10: R26.2@5911.86,4097.51 5950,4059.37 5950,3967.37 6017.7,3899.67 Q5.2@6010.63,3892.6 6142.6,3892.6 6225,3975 6305,3975 6336.86,4006.86 U44.14@6336.86,4049.76
RX: U7.2 U11.19 | length 2091.7
  Bottom Layer w10: v1@5155,3345 5483.64,3345 5880,3741.36 5880,4275 6052.85,4447.85 U7.2@6477.25,4447.85
  other v1: 5150,3337.57
RX1: U1.31 U10.4 | length 360.1
  Top Layer w10: U10.4@5875.62,3441.93 v1(5875.62,3500) ; v1(5935,3610) 6101.78,3610 U1.31@6102.22,3610.44
  Bottom Layer w10: v1(5875.62,3500) 5875.62,3550.62 v1(5935,3610)
RXD: R27.2 U11.36 | length 1766.7
  Inner1 w10: v1(5587.03,3820) 5920,3820 6120,3620 6415,3620 6485,3690 6485,4320.17 v1(6395.37,4409.8)
SCK: H2.3 U11.4 | length 183.5
  Top Layer w10: H2.3@4714.86,3827 4758.06,3870.2 U11.4@4880.51,3870.2
SCLK: U1.37 U10.3 | length 438.9
  Top Layer w10: U10.3@5836.26,3441.93 5836.26,3403.74 5870,3370 6125,3370 6161.27,3406.27 U1.37@6161.27,3452.96
SD: H1.1 U11.6 | length 926.9
  Top Layer w10: H1.1@4714.84,4127.65 4450,3862.81 4450,3780 4495,3735 4831.17,3735 4873.44,3777.27 U11.6@4880.51,3770.2
SPK+: CN1.3 U45.9 | length 935.2
  Bottom Layer w10: CN1.3@4723.11,3498.66 4819.45,3595 5311.92,3595 U45.9@5528.67,3811.75
SPK-: CN1.1 U45.8 | length 1334.8
  Bottom Layer w10: CN1.1@4486.89,3699.45 4486.89,3548.11 4595,3440 4785,3440 4840,3495 5349.72,3495 U45.8@5528.67,3673.96
STBY: LED3.1 U2.5 | length 526.1
  Top Layer w10: U2.5@6443.17,4506.28 6443.17,4531.83 6430,4545 6405,4545 6380,4570 6380,4630 6405,4655 6665.62,4655 LED3.1@6711.99,4701.37
SWDO: U1.34 U10.2 | length 382.7
  Top Layer w10: U10.2@5796.89,3441.93 5796.89,3491.89 5859.77,3554.77 6098.82,3554.77 U1.34@6102.22,3551.38
TX: U7.3 U11.20 | length 2049.3
  Bottom Layer w10: v1@5195,3295 5585,3295 5975,3685 5975,4250 6072.85,4347.85 U7.3@6477.25,4347.85
  other v1: 5200,3300
TX1: U1.30 U10.5 | length 323.8
  Top Layer w10: U10.5@5914.99,3441.93 v1(5914.99,3520) ; v1(6009.99,3632.99) 6012.87,3630.12 U1.30@6102.22,3630.12
  Bottom Layer w10: v1(5914.99,3520) 5914.99,3537.99 v1(6009.99,3632.99)
TXD: R28.2 U11.37 | length 1685.6
  Inner1 w10: v1(5595,3860) 5630,3895 6005,3895 6220,3680 6390,3680 6425,3715 6425,4313.77 v1(6326.86,4411.91)
USB_D+: U44.5 USB1.A6 USB1.B6 | length 587.1
  Top Layer w10: U44.5@6236.86,4275.94 6235,4274.08 6235,4230 6245,4220 6455,4220 6507.38,4272.38 USB1.B6@6621.45,4272.38 6662.62,4272.38 6670,4265 6670,4240 6662.93,4232.93 6621.54,4232.93 USB1.A6@6621.45,4233.01
USB_D-: U44.6 USB1.A7 USB1.B7 | length 591.1
  Top Layer w10: U44.6@6186.86,4275.94 6185,4274.08 6185,4230 6220,4195 6470,4195 6520,4245 6580,4245 ; USB1.B7@6621.45,4213.32 6621.06,4212.93 6587.07,4212.93 6580,4220 6580,4245 ; USB1.A7@6621.45,4252.69 6587.69,4252.69 6580,4245
VBUS: C6.1 D2.1 R9.2 U2.4 | length 640.4
  Top Layer w30: v1(6322.07,4520.08) 6391.96,4520.08 U2.4@6405.77,4506.28 ; D2.1@6511.86,4444.03 6544.37,4444.03 v1(6660.34,4560)
  Inner2 w30: v1(6322.07,4520.08) 6361.21,4559.22 6390.83,4559.22 6391.62,4560 v1@6660,4560
WS: H2.2 U11.5 | length 310.1
  Top Layer w10: H2.2@4614.86,3827 4671.86,3770 4730,3770 4780.19,3820.2 U11.5@4880.51,3820.2
WSDIN: LED4.4 U11.11 | length 179.6
  Top Layer w10: LED4.4@4703.43,3514.05 4874.36,3514.05 U11.11@4880.51,3520.2
pads on no net: LDO1.4 LED4.2 SW1.1 SW1.4 SW1.5 SW2.1 SW2.4 U1.1 U1.2 U1.10 U1.11 U1.14 U1.15 U1.16 U1.17 U1.19 U1.20 U1.21 U1.22 U1.32 U1.33 U1.38 U1.40 U1.41 U1.42 U4.6 U5.26 U7.4 U7.5 U7.6 U7.7 U7.8 U7.9 U7.12 U7.13 U7.14 U11.7 U11.13 U11.14 U11.15 U11.16 U11.17 U11.18 U11.21 U11.22 U11.23 U11.24 U11.25 U11.26 U11.28 U11.31 U11.32 U11.38 U11.39 U11.41 U44.7 U44.8 U44.9 U44.10 U44.11 U44.12 U44.15 U45.4 U45.5 USB1.A8 USB1.B8

## Polygon pours and split planes (outlines as drawn)
GND on Top Layer (solid, remove dead copper, pour order 0): 4310,4940 7040,4940 7040,3090 4310,3090
GND on Bottom Layer (solid, remove dead copper, pour order 2): 4245,5025 7095,5025 7095,3000 4245,3000
3.7V on Inner2 (solid, remove dead copper): 5585,4565 5605,4545 5645,4545 5665,4565 5665,4635.04 5756.17,4726.21 5784.28,4726.21 5800.03,4710.47 5800.03,4464.37 5750,4415 5750,4388.33 5795.01,4343.32 6307.19,4343.32 6336.86,4313.65 6336.86,3938.9 6355.76,3920 6375,3920 6395,3940 6395,4315 6565,4485 6649.5,4485 6720,4555.5 6720,4820 6644.94,4895.06 5664.62,4900.7 5585,4828.55
5V on Inner2 (solid, remove dead copper): 4150,5125 7025,5125 7025,3050 4150,3050
3V3 on Inner2 (solid, remove dead copper): 5375,4478.17 5375,4283.03 5981.97,4283.03 6387.06,3877.94 6612.06,3877.94 6635,3855 6635,3376.03 6560,3301.03 6560,3300 6510,3300 6281.14,3528.86 5962.56,3528.86 5833.69,3400 5730.77,3400 5700,3430.77 5700,3515 5775,3590 6290,3590 6345,3645 6345,3830 5990,4185 5325,4185 5273.69,4236.31 5273.69,4478.86 5299.84,4505 5349.34,4505

## Keep-outs
Board Outline Layer:
  the board outline again, w10